# Altium PCB F_ROM.PcbDoc (part 2 of 3)
Units mil, origin at the board's own origin, x right, y up, seen from the top; angles counter-clockwise.
Board outline 10300 x 6600 mil, 2 copper layers (Top Layer, Bottom Layer); 788 components, 376 nets, 1392 pads, 0 vias.
Unrouted connection lines stored in the file: 465.
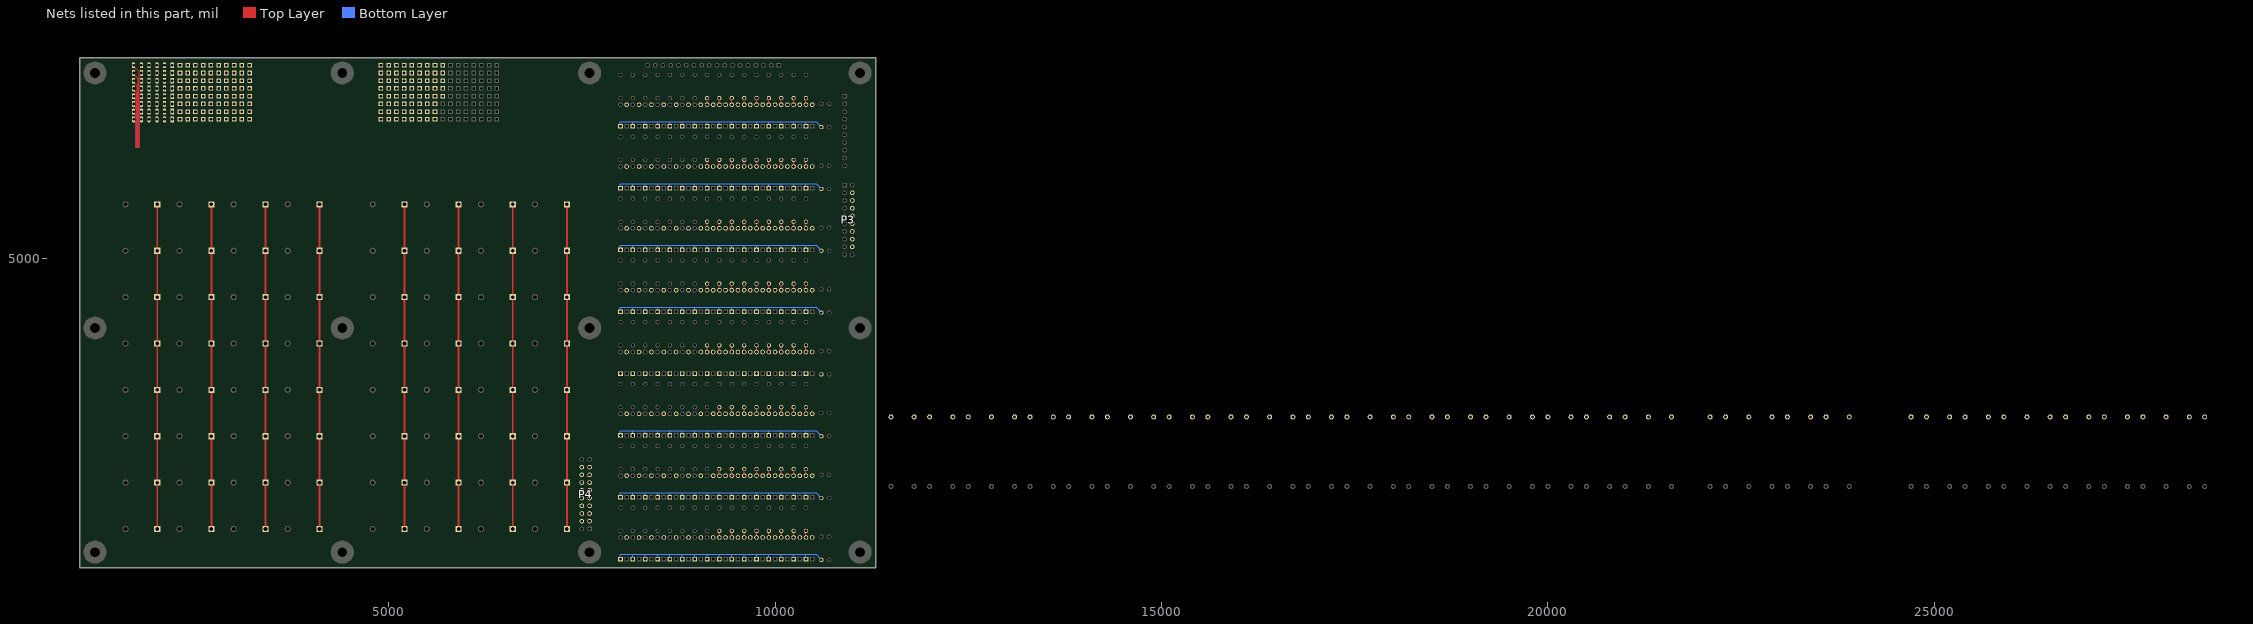
[diagram p2: the nets of this part, all layers, seen from the top]

## Components (designator, comment, footprint, x,y, rotation, side; value= is the part's Value field where it differs from the comment) (continued)
R1_S4 "" AXIAL-0.3 10400,4825 r90 top value=100k (schematic designator R1)
R1_S5 "" AXIAL-0.3 10400,4025 r90 top value=100k (schematic designator R1)
R1_S6 "" AXIAL-0.3 10400,3225 r90 top value=100k (schematic designator R1)
R1_S7 "" AXIAL-0.3 10400,2425 r90 top value=100k (schematic designator R1)
R1_S8 "" AXIAL-0.3 10400,1625 r90 top value=100k (schematic designator R1)
R2_S1 "" AXIAL-0.3 10240,7225 r90 top value=100k (schematic designator R2)
R2_S2 "" AXIAL-0.3 10240,6425 r90 top value=100k (schematic designator R2)
R2_S3 "" AXIAL-0.3 10240,5625 r90 top value=100k (schematic designator R2)
R2_S4 "" AXIAL-0.3 10240,4825 r90 top value=100k (schematic designator R2)
R2_S5 "" AXIAL-0.3 10240,4025 r90 top value=100k (schematic designator R2)
R2_S6 "" AXIAL-0.3 10240,3225 r90 top value=100k (schematic designator R2)
R2_S7 "" AXIAL-0.3 10240,2425 r90 top value=100k (schematic designator R2)
R2_S8 "" AXIAL-0.3 10240,1625 r90 top value=100k (schematic designator R2)
R3_S1 "" AXIAL-0.3 10080,7225 r90 top value=100k (schematic designator R3)
R3_S2 "" AXIAL-0.3 10080,6425 r90 top value=100k (schematic designator R3)
R3_S3 "" AXIAL-0.3 10080,5625 r90 top value=100k (schematic designator R3)
R3_S4 "" AXIAL-0.3 10080,4825 r90 top value=100k (schematic designator R3)
R3_S5 "" AXIAL-0.3 10080,4025 r90 top value=100k (schematic designator R3)
R3_S6 "" AXIAL-0.3 10080,3225 r90 top value=100k (schematic designator R3)
R3_S7 "" AXIAL-0.3 10080,2425 r90 top value=100k (schematic designator R3)
R3_S8 "" AXIAL-0.3 10080,1625 r90 top value=100k (schematic designator R3)
R4_S1 "" AXIAL-0.3 9920,7225 r90 top value=100k (schematic designator R4)
R4_S2 "" AXIAL-0.3 9920,6425 r90 top value=100k (schematic designator R4)
R4_S3 "" AXIAL-0.3 9920,5625 r90 top value=100k (schematic designator R4)
R4_S4 "" AXIAL-0.3 9920,4825 r90 top value=100k (schematic designator R4)
R4_S5 "" AXIAL-0.3 9920,4025 r90 top value=100k (schematic designator R4)
R4_S6 "" AXIAL-0.3 9920,3225 r90 top value=100k (schematic designator R4)
R4_S7 "" AXIAL-0.3 9920,2425 r90 top value=100k (schematic designator R4)
R4_S8 "" AXIAL-0.3 9920,1625 r90 top value=100k (schematic designator R4)
R5_S1 "" AXIAL-0.3 9760,7225 r90 top value=100k (schematic designator R5)
R5_S2 "" AXIAL-0.3 9760,6425 r90 top value=100k (schematic designator R5)
R5_S3 "" AXIAL-0.3 9760,5625 r90 top value=100k (schematic designator R5)
R5_S4 "" AXIAL-0.3 9760,4825 r90 top value=100k (schematic designator R5)
R5_S5 "" AXIAL-0.3 9760,4025 r90 top value=100k (schematic designator R5)
R5_S6 "" AXIAL-0.3 9760,3225 r90 top value=100k (schematic designator R5)
R5_S7 "" AXIAL-0.3 9760,2425 r90 top value=100k (schematic designator R5)
R5_S8 "" AXIAL-0.3 9760,1625 r90 top value=100k (schematic designator R5)
R6_S1 "" AXIAL-0.3 9600,7225 r90 top value=100k (schematic designator R6)
R6_S2 "" AXIAL-0.3 9600,6425 r90 top value=100k (schematic designator R6)
R6_S3 "" AXIAL-0.3 9600,5625 r90 top value=100k (schematic designator R6)
R6_S4 "" AXIAL-0.3 9600,4825 r90 top value=100k (schematic designator R6)
R6_S5 "" AXIAL-0.3 9600,4025 r90 top value=100k (schematic designator R6)
R6_S6 "" AXIAL-0.3 9600,3225 r90 top value=100k (schematic designator R6)
R6_S7 "" AXIAL-0.3 9600,2425 r90 top value=100k (schematic designator R6)
R6_S8 "" AXIAL-0.3 9600,1625 r90 top value=100k (schematic designator R6)
R7_S1 "" AXIAL-0.3 9440,7225 r90 top value=100k (schematic designator R7)
R7_S2 "" AXIAL-0.3 9440,6425 r90 top value=100k (schematic designator R7)
R7_S3 "" AXIAL-0.3 9440,5625 r90 top value=100k (schematic designator R7)
R7_S4 "" AXIAL-0.3 9440,4825 r90 top value=100k (schematic designator R7)
R7_S5 "" AXIAL-0.3 9440,4025 r90 top value=100k (schematic designator R7)
R7_S6 "" AXIAL-0.3 9440,3225 r90 top value=100k (schematic designator R7)
R7_S7 "" AXIAL-0.3 9440,2425 r90 top value=100k (schematic designator R7)
R7_S8 "" AXIAL-0.3 9440,1625 r90 top value=100k (schematic designator R7)
R8_S1 "" AXIAL-0.3 9280,7225 r90 top value=100k (schematic designator R8)
R8_S2 "" AXIAL-0.3 9280,6425 r90 top value=100k (schematic designator R8)
R8_S3 "" AXIAL-0.3 9280,5625 r90 top value=100k (schematic designator R8)
R8_S4 "" AXIAL-0.3 9280,4825 r90 top value=100k (schematic designator R8)
R8_S5 "" AXIAL-0.3 9280,4025 r90 top value=100k (schematic designator R8)
R8_S6 "" AXIAL-0.3 9280,3225 r90 top value=100k (schematic designator R8)
R8_S7 "" AXIAL-0.3 9280,2425 r90 top value=100k (schematic designator R8)
R8_S8 "" AXIAL-0.3 9280,1625 r90 top value=100k (schematic designator R8)
R9_S1 "" AXIAL-0.3 9120,7225 r90 top value=100k (schematic designator R9)
R9_S2 "" AXIAL-0.3 9120,6425 r90 top value=100k (schematic designator R9)
R9_S3 "" AXIAL-0.3 9120,5625 r90 top value=100k (schematic designator R9)
R9_S4 "" AXIAL-0.3 9120,4825 r90 top value=100k (schematic designator R9)
R9_S5 "" AXIAL-0.3 9120,4025 r90 top value=100k (schematic designator R9)
R9_S6 "" AXIAL-0.3 9120,3225 r90 top value=100k (schematic designator R9)
R9_S7 "" AXIAL-0.3 9120,2425 r90 top value=100k (schematic designator R9)
R9_S8 "" AXIAL-0.3 9120,1625 r90 top value=100k (schematic designator R9)
R10_S1 "" AXIAL-0.3 8960,7225 r90 top value=100k (schematic designator R10)
R10_S2 "" AXIAL-0.3 8960,6425 r90 top value=100k (schematic designator R10)
R10_S3 "" AXIAL-0.3 8960,5625 r90 top value=100k (schematic designator R10)
R10_S4 "" AXIAL-0.3 8960,4825 r90 top value=100k (schematic designator R10)
R10_S5 "" AXIAL-0.3 8960,4025 r90 top value=100k (schematic designator R10)
R10_S6 "" AXIAL-0.3 8960,3225 r90 top value=100k (schematic designator R10)
R10_S7 "" AXIAL-0.3 8960,2425 r90 top value=100k (schematic designator R10)
R10_S8 "" AXIAL-0.3 8960,1625 r90 top value=100k (schematic designator R10)
R11_S1 "" AXIAL-0.3 8800,7225 r90 top value=100k (schematic designator R11)
R11_S2 "" AXIAL-0.3 8800,6425 r90 top value=100k (schematic designator R11)
R11_S3 "" AXIAL-0.3 8800,5625 r90 top value=100k (schematic designator R11)
R11_S4 "" AXIAL-0.3 8800,4825 r90 top value=100k (schematic designator R11)
R11_S5 "" AXIAL-0.3 8800,4025 r90 top value=100k (schematic designator R11)
R11_S6 "" AXIAL-0.3 8800,3225 r90 top value=100k (schematic designator R11)
R11_S7 "" AXIAL-0.3 8800,2425 r90 top value=100k (schematic designator R11)
R11_S8 "" AXIAL-0.3 8800,1625 r90 top value=100k (schematic designator R11)
R12_S1 "" AXIAL-0.3 8640,7225 r90 top value=100k (schematic designator R12)
R12_S2 "" AXIAL-0.3 8640,6425 r90 top value=100k (schematic designator R12)
R12_S3 "" AXIAL-0.3 8640,5625 r90 top value=100k (schematic designator R12)
R12_S4 "" AXIAL-0.3 8640,4825 r90 top value=100k (schematic designator R12)
R12_S5 "" AXIAL-0.3 8640,4025 r90 top value=100k (schematic designator R12)
R12_S6 "" AXIAL-0.3 8640,3225 r90 top value=100k (schematic designator R12)
R12_S7 "" AXIAL-0.3 8640,2425 r90 top value=100k (schematic designator R12)
R12_S8 "" AXIAL-0.3 8640,1625 r90 top value=100k (schematic designator R12)
R13_S1 "" AXIAL-0.3 8480,7225 r90 top value=100k (schematic designator R13)
R13_S2 "" AXIAL-0.3 8480,6425 r90 top value=100k (schematic designator R13)
R13_S3 "" AXIAL-0.3 8480,5625 r90 top value=100k (schematic designator R13)
R13_S4 "" AXIAL-0.3 8480,4825 r90 top value=100k (schematic designator R13)
R13_S5 "" AXIAL-0.3 8480,4025 r90 top value=100k (schematic designator R13)
R13_S6 "" AXIAL-0.3 8480,3225 r90 top value=100k (schematic designator R13)
R13_S7 "" AXIAL-0.3 8480,2425 r90 top value=100k (schematic designator R13)
R13_S8 "" AXIAL-0.3 8480,1625 r90 top value=100k (schematic designator R13)
R14_S1 "" AXIAL-0.3 8320,7225 r90 top value=100k (schematic designator R14)
R14_S2 "" AXIAL-0.3 8320,6425 r90 top value=100k (schematic designator R14)
R14_S3 "" AXIAL-0.3 8320,5625 r90 top value=100k (schematic designator R14)
R14_S4 "" AXIAL-0.3 8320,4825 r90 top value=100k (schematic designator R14)
R14_S5 "" AXIAL-0.3 8320,4025 r90 top value=100k (schematic designator R14)
R14_S6 "" AXIAL-0.3 8320,3225 r90 top value=100k (schematic designator R14)
R14_S7 "" AXIAL-0.3 8320,2425 r90 top value=100k (schematic designator R14)
R14_S8 "" AXIAL-0.3 8320,1625 r90 top value=100k (schematic designator R14)
R15_S1 "" AXIAL-0.3 8160,7225 r90 top value=100k (schematic designator R15)
R15_S2 "" AXIAL-0.3 8160,6425 r90 top value=100k (schematic designator R15)
R15_S3 "" AXIAL-0.3 8160,5625 r90 top value=100k (schematic designator R15)
R15_S4 "" AXIAL-0.3 8160,4825 r90 top value=100k (schematic designator R15)
R15_S5 "" AXIAL-0.3 8160,4025 r90 top value=100k (schematic designator R15)
R15_S6 "" AXIAL-0.3 8160,3225 r90 top value=100k (schematic designator R15)
R15_S7 "" AXIAL-0.3 8160,2425 r90 top value=100k (schematic designator R15)
R15_S8 "" AXIAL-0.3 8160,1625 r90 top value=100k (schematic designator R15)
R16_S1 "" AXIAL-0.3 8000,7225 r90 top value=100k (schematic designator R16)
R16_S2 "" AXIAL-0.3 8000,6425 r90 top value=100k (schematic designator R16)
R16_S3 "" AXIAL-0.3 8000,5625 r90 top value=100k (schematic designator R16)
R16_S4 "" AXIAL-0.3 8000,4825 r90 top value=100k (schematic designator R16)
R16_S5 "" AXIAL-0.3 8000,4025 r90 top value=100k (schematic designator R16)
R16_S6 "" AXIAL-0.3 8000,3225 r90 top value=100k (schematic designator R16)
R16_S7 "" AXIAL-0.3 8000,2425 r90 top value=100k (schematic designator R16)
R16_S8 "" AXIAL-0.3 8000,1625 r90 top value=100k (schematic designator R16)
R17_S1 "" AXIAL-0.3 10700,6850 r90 top value=100k (schematic designator R17)
R17_S2 "" AXIAL-0.3 10700,6050 r90 top value=100k (schematic designator R17)
R17_S3 "" AXIAL-0.3 10700,5250 r90 top value=100k (schematic designator R17)
R17_S4 "" AXIAL-0.3 10700,4450 r90 top value=100k (schematic designator R17)
R17_S5 "" AXIAL-0.3 10700,3650 r90 top value=100k (schematic designator R17)
R17_S6 "" AXIAL-0.3 10700,2850 r90 top value=100k (schematic designator R17)
R17_S7 "" AXIAL-0.3 10700,2050 r90 top value=100k (schematic designator R17)
R17_S8 "" AXIAL-0.3 10700,1250 r90 top value=100k (schematic designator R17)
R18_S1 "" AXIAL-0.3 10600,6850 r270 top value=100k (schematic designator R18)
R18_S2 "" AXIAL-0.3 10600,6050 r270 top value=100k (schematic designator R18)
R18_S3 "" AXIAL-0.3 10600,5250 r270 top value=100k (schematic designator R18)
R18_S4 "" AXIAL-0.3 10600,4450 r270 top value=100k (schematic designator R18)
R18_S5 "" AXIAL-0.3 10600,3650 r270 top value=100k (schematic designator R18)
R18_S6 "" AXIAL-0.3 10600,2850 r270 top value=100k (schematic designator R18)
R18_S7 "" AXIAL-0.3 10600,2050 r270 top value=100k (schematic designator R18)
R18_S8 "" AXIAL-0.3 10600,1250 r270 top value=100k (schematic designator R18)

## Footprints (in the part's own frame and the unit in brackets; to place one, negate y for a bottom-side part, rotate by r counter-clockwise, add the part's x,y. Pads: shape width x height; smd on the part's side, far side on the other; paste and mask are expansions set on the pad)
AXIAL-0.3 [mm] "Axial Device, Thru-Hole; 2 Leads; 0.3 in Pin Spacing"
  round 1.4 hole 0.85: 1(-3.81,0) 2(3.81,0)
  silkscreen extent -2.77,-0.76 2.77,0.76
AXIAL-0.9 [mm] "Axial Device, Thru-Hole; 2 Leads; 0.9 in Pin Spacing"
  round 1.65 hole 1: 1(-11.43,0) 2(11.43,0)
  silkscreen extent -9.53,-2.54 9.53,2.54
DO-35 [mm] "Diode, Axial; Body 3.8 x 1.9 mm (LxDia. max), Lead Dia. 0.53 mm (max)"
  round 1.5 hole 0.9: 1(-3.55,0)
  rect 1.5x1.5 hole 0.9: 2(3.55,0)
  silkscreen extent -1.95,-0.95 2.05,0.95
DO-41 [mm] "Diode, Axial; Body 5.2 x 2.7 mm (LxDia. max), Lead Dia. 0.86 mm (max)"
  round 2 hole 1.2: 1(-5.23,0)
  rect 2x2 hole 1.2: 2(5.23,0)
  silkscreen extent -2.65,-1.4 2.75,1.4
HDR1X10 [mm] "Connector; Header; 10 Position"
  rect 1.5x1.5 hole 0.9: 1(0,0)
  round 1.5 hole 0.9: 2(2.54,0) 3(5.08,0) 4(7.62,0) 5(10.16,0) 6(12.7,0) 7(15.24,0) 8(17.78,0) 9(20.32,0) 10(22.86,0)
  silkscreen extent -1.27,-1.27 24.13,1.27
HDR1X18 [mm] "Connector; Header; 18 Position"
  rect 1.5x1.5 hole 0.9: 1(0,0)
  round 1.5 hole 0.9: 2(2.54,0) 3(5.08,0) 4(7.62,0) 5(10.16,0) 6(12.7,0) 7(15.24,0) 8(17.78,0) 9(20.32,0) 10(22.86,0) 11(25.4,0) 12(27.94,0) 13(30.48,0) 14(33.02,0) 15(35.56,0) 16(38.1,0) 17(40.64,0) 18(43.18,0)
  silkscreen extent -1.27,-1.27 44.45,1.27
HDR2X10 [mm] "Connector; Header; 10x2 Position"
  rect 1.5x1.5 hole 0.9: 1(0,0)
  round 1.5 hole 0.9: 2(0,2.54) 3(2.54,0) 4(2.54,2.54) 5(5.08,0) 6(5.08,2.54) 7(7.62,0) 8(7.62,2.54) 9(10.16,0) 10(10.16,2.54) 11(12.7,0) 12(12.7,2.54) 13(15.24,0) 14(15.24,2.54) 15(17.78,0) 16(17.78,2.54) 17(20.32,0) 18(20.32,2.54) 19(22.86,0) 20(22.86,2.54)
  silkscreen extent -1.27,-1.27 24.13,3.81
PIN1#1 [mil] "Connector; Plug"
  rrect50% 40.5x75 hole 35.43: 1(0,0)
  silkscreen extent -55,-55 55,86
PIN1#2 [mil] "Connector; Plug"
  rect 40.5x75 hole 35.43: 1(0,0)
  silkscreen extent -55,-55 55,86
PIN1#3 [mil] "Connector; Plug"
  rect 59.06x59.06 hole 35.43: 1(0,0)
  silkscreen extent -55,-55 55,86

## Part data
D1_S1 D1_S2 D1_S3 D1_S4 D1_S5 D1_S6 D1_S7 D1_S8 D2_S1 D2_S2 D2_S3 D2_S4 D2_S5 D2_S6 D2_S7 D2_S8 D3_S1 D3_S2 D3_S3 D3_S4 D3_S5 D3_S6 D3_S7 D3_S8 D4_S1 D4_S2 D4_S3 D4_S4 D4_S5 D4_S6 D4_S7 D4_S8 D5_S1 D5_S2 D5_S3 D5_S4 D5_S5 D5_S6 D5_S7 D5_S8 D6_S1 D6_S2 D6_S3 D6_S4 D6_S5 D6_S6 D6_S7 D6_S8 D7_S1 D7_S2 D7_S3 D7_S4 D7_S5 D7_S6 D7_S7 D7_S8 D8_S1 D8_S2 D8_S3 D8_S4 D8_S5 D8_S6 D8_S7 D8_S8 D9_S1 D9_S2 D9_S3 D9_S4 D9_S5 D9_S6 D9_S7 D9_S8 D10_S1 D10_S2 D10_S3 D10_S4 D10_S5 D10_S6 D10_S7 D10_S8 D11_S1 D11_S2 D11_S3 D11_S4 D11_S5 D11_S6 D11_S7 D11_S8 D12_S1 D12_S2 D12_S3 D12_S4 D12_S5 D12_S6 D12_S7 D12_S8 D13_S1 D13_S2 D13_S3 D13_S4 D13_S5 D13_S6 D13_S7 D13_S8 D14_S1 D14_S2 D14_S3 D14_S4 D14_S5 D14_S6 D14_S7 D14_S8 D15_S1 D15_S2 D15_S3 D15_S4 D15_S5 D15_S6 D15_S7 D15_S8 D16_S1 D16_S2 D16_S3 D16_S4 D16_S5 D16_S6 D16_S7 D16_S8 D17_S1 D17_S2 D17_S3 D17_S4 D17_S5 D17_S6 D17_S7 D17_S8 D18_S1 D18_S2 D18_S3 D18_S4 D18_S5 D18_S6 D18_S7 D18_S8 D19_S1 D19_S2 D19_S3 D19_S4 D19_S5 D19_S6 D19_S7 D19_S8 D20_S1 D20_S2 D20_S3 D20_S4 D20_S5 D20_S6 D20_S7 D20_S8 D21_S1 D21_S2 D21_S3 D21_S4 D21_S5 D21_S6 D21_S7 D21_S8 D22_S1 D22_S2 D22_S3 D22_S4 D22_S5 D22_S6 D22_S7 D22_S8 D23_S1 D23_S2 D23_S3 D23_S4 D23_S5 D23_S6 D23_S7 D23_S8 D24_S1 D24_S2 D24_S3 D24_S4 D24_S5 D24_S6 D24_S7 D24_S8 D25_S1 D25_S2 D25_S3 D25_S4 D25_S5 D25_S6 D25_S7 D25_S8 D26_S1 D26_S2 D26_S3 D26_S4 D26_S5 D26_S6 D26_S7 D26_S8 D27_S1 D27_S2 D27_S3 D27_S4 D27_S5 D27_S6 D27_S7 D27_S8 D28_S1 D28_S2 D28_S3 D28_S4 D28_S5 D28_S6 D28_S7 D28_S8 D29_S1 D29_S2 D29_S3 D29_S4 D29_S5 D29_S6 D29_S7 D29_S8 D30_S1 D30_S2 D30_S3 D30_S4 D30_S5 D30_S6 D30_S7 D30_S8 D31_S1 D31_S2 D31_S3 D31_S4 D31_S5 D31_S6 D31_S7 D31_S8 D32_S1 D32_S2 D32_S3 D32_S4 D32_S5 D32_S6 D32_S7 D32_S8: library part "Diode 1N4148", "High Conductance Fast Diode", Code_JEDEC=DO-204-AH, ComponentLink1Description="Manufacturer Link", ComponentLink1URL=http://www.fairchildsemi.com/, ComponentLink2Description=Datasheet, ComponentLink2URL=http://www.fairchildsemi.com/ds/1N%2F1N4148.pdf, DatasheetVersion=1997, LatestRevisionDate=17-Jul-2002, LatestRevisionNote="Re-released for DXP Platform.", PackageDescription="Diode, Axial; Body 3.8 x 1.9 mm (LxDia. max), Lead Dia. 0.53 mm (max)", PackageReference=DO-35, Published=8-Jun-2000, Publisher="Altium Limited"
D101 D102 D103 D104 D105 D106 D107 D108 D109 D110 D111 D112 D113 D114 D115 D116 D117 D118 D119 D120 D121 D122 D123 D124 D125 D126 D127 D128 D129 D130 D131 D132 D133 D134 D135 D136 D137 D138 D139 D140 D141 D142 D143 D144 D145 D146 D147 D148 D149 D150 D151 D152 D153 D154 D155 D156 D157 D158 D159 D160 D161 D162 D163 D164: library part "Diode 1N4007", "1 Amp General Purpose Rectifier", Code_JEDEC=DO-204-AL, ComponentLink1Description="Manufacturer Link", ComponentLink1URL=http://www.fairchildsemi.com/, ComponentLink2Description=Datasheet, ComponentLink2URL=http://www.fairchildsemi.com/ds/1N%2F1N4001.pdf, DatasheetVersion=1998, LatestRevisionDate=17-Jul-2002, LatestRevisionNote="Re-released for DXP Platform.", PackageDescription="Diode, Axial; Body 5.2 x 2.7 mm (LxDia. max), Lead Dia. 0.86 mm (max)", PackageReference=DO-41, PackageVersion=Aug-1999, Published=8-Jun-2000, Publisher="Altium Limited"
L1 L2 L3 L4 L5 L6 L7 L8 L9 L10 L11 L12 L13 L14 L15 L16 L17 L18 L19 L20 L21 L22 L23 L24 L25 L26 L27 L28 L29 L30 L31 L32 L33 L34 L35 L36 L37 L38 L39 L40 L41 L42 L43 L44 L45 L46 L47 L48 L49 L50 L51 L52 L53 L54 L55 L56 L57 L58 L59 L60 L61 L62 L63 L64: "Magnetic-Core Inductor", LatestRevisionDate=17-Jul-2002, LatestRevisionNote="Re-released for DXP Platform.", PackageDescription="Axial Device, Thru-Hole; 2 Leads; 0.9 in Pin Spacing", PackageReference=AXIAL-0.9, Published=24-Mar-1999, Publisher="Altium Limited"
P1: library part "Header 18", "Header, 18-Pin", LatestRevisionDate=17-Jul-2002, LatestRevisionNote="Re-released for DXP Platform.", Publisher="Altium Limited"
P2: library part "Header 10", "Header, 10-Pin", LatestRevisionDate=17-Jul-2002, LatestRevisionNote="Re-released for DXP Platform.", Publisher="Altium Limited"
P3 P4: library part "Header 10X2", "Header, 10-Pin, Dual row", LatestRevisionDate=17-Jul-2002, LatestRevisionNote="Re-released for DXP Platform.", Publisher="Altium Limited"
R1_S1 R1_S2 R1_S3 R1_S4 R1_S5 R1_S6 R1_S7 R1_S8 R2_S1 R2_S2 R2_S3 R2_S4 R2_S5 R2_S6 R2_S7 R2_S8 R3_S1 R3_S2 R3_S3 R3_S4 R3_S5 R3_S6 R3_S7 R3_S8 R4_S1 R4_S2 R4_S3 R4_S4 R4_S5 R4_S6 R4_S7 R4_S8 R5_S1 R5_S2 R5_S3 R5_S4 R5_S5 R5_S6 R5_S7 R5_S8 R6_S1 R6_S2 R6_S3 R6_S4 R6_S5 R6_S6 R6_S7 R6_S8 R7_S1 R7_S2 R7_S3 R7_S4 R7_S5 R7_S6 R7_S7 R7_S8 R8_S1 R8_S2 R8_S3 R8_S4 R8_S5 R8_S6 R8_S7 R8_S8 R9_S1 R9_S2 R9_S3 R9_S4 R9_S5 R9_S6 R9_S7 R9_S8 R10_S1 R10_S2 R10_S3 R10_S4 R10_S5 R10_S6 R10_S7 R10_S8 R11_S1 R11_S2 R11_S3 R11_S4 R11_S5 R11_S6 R11_S7 R11_S8 R12_S1 R12_S2 R12_S3 R12_S4 R12_S5 R12_S6 R12_S7 R12_S8 R13_S1 R13_S2 R13_S3 R13_S4 R13_S5 R13_S6 R13_S7 R13_S8 R14_S1 R14_S2 R14_S3 R14_S4 R14_S5 R14_S6 R14_S7 R14_S8 R15_S1 R15_S2 R15_S3 R15_S4 R15_S5 R15_S6 R15_S7 R15_S8 R16_S1 R16_S2 R16_S3 R16_S4 R16_S5 R16_S6 R16_S7 R16_S8 R17_S1 R17_S2 R17_S3 R17_S4 R17_S5 R17_S6 R17_S7 R17_S8 R18_S1 R18_S2 R18_S3 R18_S4 R18_S5 R18_S6 R18_S7 R18_S8: library part Res1, "Resistor", LatestRevisionDate=17-Jul-2002, LatestRevisionNote="Re-released for DXP Platform.", PackageDescription="Axial Device, Thru-Hole; 2 Leads; 0.3 in Pin Spacing", PackageReference=AXIAL-0.3, Published=8-Jun-2000, Publisher="Altium Limited"
A1_S1 A1_S2 A1_S3 A1_S4 A1_S5 A1_S6 A1_S7 A1_S8 A2_S1 A2_S2 A2_S3 A2_S4 A2_S5 A2_S6 A2_S7 A2_S8 A3_S1 A3_S2 A3_S3 A3_S4 A3_S5 A3_S6 A3_S7 A3_S8 A4_S1 A4_S2 A4_S3 A4_S4 A4_S5 A4_S6 A4_S7 A4_S8 A5_S1 A5_S2 A5_S3 A5_S4 A5_S5 A5_S6 A5_S7 A5_S8 A6_S1 A6_S2 A6_S3 A6_S4 A6_S5 A6_S6 A6_S7 A6_S8 A7_S1 A7_S2 A7_S3 A7_S4 A7_S5 A7_S6 A7_S7 A7_S8 A8_S1 A8_S2 A8_S3 A8_S4 A8_S5 A8_S6 A8_S7 A8_S8 A9_S1 A9_S2 A9_S3 A9_S4 A9_S5 A9_S6 A9_S7 A9_S8 A10_S1 A10_S2 A10_S3 A10_S4 A10_S5 A10_S6 A10_S7 A10_S8 A11_S1 A11_S2 A11_S3 A11_S4 A11_S5 A11_S6 A11_S7 A11_S8 A12_S1 A12_S2 A12_S3 A12_S4 A12_S5 A12_S6 A12_S7 A12_S8 A13_S1 A13_S2 A13_S3 A13_S4 A13_S5 A13_S6 A13_S7 A13_S8 A14_S1 A14_S2 A14_S3 A14_S4 A14_S5 A14_S6 A14_S7 A14_S8 A15_S1 A15_S2 A15_S3 A15_S4 A15_S5 A15_S6 A15_S7 A15_S8 A16_S1 A16_S2 A16_S3 A16_S4 A16_S5 A16_S6 A16_S7 A16_S8 B1_S1 B1_S2 B1_S3 B1_S4 B1_S5 B1_S6 B1_S7 B1_S8 B2_S1 B2_S2 B2_S3 B2_S4 B2_S5 B2_S6 B2_S7 B2_S8 B3_S1 B3_S2 B3_S3 B3_S4 B3_S5 B3_S6 B3_S7 B3_S8 B4_S1 B4_S2 B4_S3 B4_S4 B4_S5 B4_S6 B4_S7 B4_S8 B5_S1 B5_S2 B5_S3 B5_S4 B5_S5 B5_S6 B5_S7 B5_S8 B6_S1 B6_S2 B6_S3 B6_S4 B6_S5 B6_S6 B6_S7 B6_S8 B7_S1 B7_S2 B7_S3 B7_S4 B7_S5 B7_S6 B7_S7 B7_S8 B8_S1 B8_S2 B8_S3 B8_S4 B8_S5 B8_S6 B8_S7 B8_S8 B9_S1 B9_S2 B9_S3 B9_S4 B9_S5 B9_S6 B9_S7 B9_S8 B10_S1 B10_S2 B10_S3 B10_S4 B10_S5 B10_S6 B10_S7 B10_S8 B11_S1 B11_S2 B11_S3 B11_S4 B11_S5 B11_S6 B11_S7 B11_S8 B12_S1 B12_S2 B12_S3 B12_S4 B12_S5 B12_S6 B12_S7 B12_S8 B13_S1 B13_S2 B13_S3 B13_S4 B13_S5 B13_S6 B13_S7 B13_S8 B14_S1 B14_S2 B14_S3 B14_S4 B14_S5 B14_S6 B14_S7 B14_S8 B15_S1 B15_S2 B15_S3 B15_S4 B15_S5 B15_S6 B15_S7 B15_S8 B16_S1 B16_S2 B16_S3 B16_S4 B16_S5 B16_S6 B16_S7 B16_S8: LatestRevisionDate=17-Jul-2002, LatestRevisionNote="Re-released for DXP Platform.", Publisher="Altium Limited"

## Free pads (board coordinates)
  round 300 hole 126: 11(1200,1200) 11(1200,4100) 11(1200,7400) 11(4400,1200) 11(4400,4100) 11(4400,7400) 11(7600,1200) 11(7600,4100) 11(7600,7400) 11(11100,1200) 11(11100,4100) 11(11100,7400)

## Nets (pads, with @x,y where several pads share a name; then routed paths per layer and width w, separated by ;. In a path a pad name is that pad's centre, name@x,y a point inside that pad or via, vN(x,y) a via of type N, cw(c..) or ccw(c..) an arc to the next point about the centre after c; other vN are vias at no path point)
H1: L1.2 L2.2 L3.2 L4.2 L5.2 L6.2 L7.2 L8.2 P4.3
H2: L9.2 L10.2 L11.2 L12.2 L13.2 L14.2 L15.2 L16.2 P4.5
H3: L17.2 L18.2 L19.2 L20.2 L21.2 L22.2 L23.2 L24.2 P4.7
H4: L25.2 L26.2 L27.2 L28.2 L29.2 L30.2 L31.2 L32.2 P4.9
H5: L33.2 L34.2 L35.2 L36.2 L37.2 L38.2 L39.2 L40.2 P4.11
H6: L41.2 L42.2 L43.2 L44.2 L45.2 L46.2 L47.2 L48.2 P4.13
H7: L49.2 L50.2 L51.2 L52.2 L53.2 L54.2 L55.2 L56.2 P4.15
H8: L57.2 L58.2 L59.2 L60.2 L61.2 L62.2 L63.2 L64.2 P4.17
L1: D101.2 D109.2 D117.2 D125.2 D133.2 D141.2 D149.2 D157.2 P4.4 | length 4200
  Top Layer w25: D157.2@7305.91,1500 D149.2@7305.91,2100 D141.2@7305.91,2700 D133.2@7305.91,3300 D125.2@7305.91,3900 D117.2@7305.91,4500 D109.2@7305.91,5100 D101.2@7305.91,5700
L2: D102.2 D110.2 D118.2 D126.2 D134.2 D142.2 D150.2 D158.2 P4.6 | length 4200
  Top Layer w25: D158.2@6605.91,1500 D150.2@6605.91,2100 D142.2@6605.91,2700 D134.2@6605.91,3300 D126.2@6605.91,3900 D118.2@6605.91,4500 D110.2@6605.91,5100 D102.2@6605.91,5700
L3: D103.2 D111.2 D119.2 D127.2 D135.2 D143.2 D151.2 D159.2 P4.8 | length 4200
  Top Layer w25: D159.2@5905.91,1500 D151.2@5905.91,2100 D143.2@5905.91,2700 D135.2@5905.91,3300 D127.2@5905.91,3900 D119.2@5905.91,4500 D111.2@5905.91,5100 D103.2@5905.91,5700
L4: D104.2 D112.2 D120.2 D128.2 D136.2 D144.2 D152.2 D160.2 P4.10 | length 4200
  Top Layer w25: D160.2@5205.91,1500 D152.2@5205.91,2100 D144.2@5205.91,2700 D136.2@5205.91,3300 D128.2@5205.91,3900 D120.2@5205.91,4500 D112.2@5205.91,5100 D104.2@5205.91,5700
L5: D105.2 D113.2 D121.2 D129.2 D137.2 D145.2 D153.2 D161.2 P4.12 | length 4200
  Top Layer w25: D161.2@4105.91,1500 D153.2@4105.91,2100 D145.2@4105.91,2700 D137.2@4105.91,3300 D129.2@4105.91,3900 D121.2@4105.91,4500 D113.2@4105.91,5100 D105.2@4105.91,5700
L6: D106.2 D114.2 D122.2 D130.2 D138.2 D146.2 D154.2 D162.2 P4.14 | length 4200
  Top Layer w25: D162.2@3405.91,1500 D154.2@3405.91,2100 D146.2@3405.91,2700 D138.2@3405.91,3300 D130.2@3405.91,3900 D122.2@3405.91,4500 D114.2@3405.91,5100 D106.2@3405.91,5700
L7: D107.2 D115.2 D123.2 D131.2 D139.2 D147.2 D155.2 D163.2 P4.16 | length 4200
  Top Layer w25: D163.2@2705.91,1500 D155.2@2705.91,2100 D147.2@2705.91,2700 D139.2@2705.91,3300 D131.2@2705.91,3900 D123.2@2705.91,4500 D115.2@2705.91,5100 D107.2@2705.91,5700
L8: D108.2 D116.2 D124.2 D132.2 D140.2 D148.2 D156.2 D164.2 P4.18 | length 4200
  Top Layer w25: D164.2@2005.91,1500 D156.2@2005.91,2100 D148.2@2005.91,2700 D140.2@2005.91,3300 D132.2@2005.91,3900 D124.2@2005.91,4500 D116.2@2005.91,5100 D108.2@2005.91,5700
N1: D2_S1.2 D4_S1.2 D6_S1.2 D8_S1.2 D10_S1.2 D12_S1.2 D14_S1.2 D16_S1.2 D18_S1.2 D20_S1.2 D22_S1.2 D24_S1.2 D26_S1.2 D28_S1.2 D30_S1.2 D32_S1.2 P3.4 R18_S1.2 | length 3585.2
  Bottom Layer w6: D32_S1.2@8000,6710.24 8000,6770 8160,6770 ; D30_S1.2@8160,6710.24 8160,6770 ; D28_S1.2@8320,6710.24 8320,6770 ; D26_S1.2@8480,6710.24 8480,6770 8320,6770 ; 8480,6769.76 8640,6769.76 ; D24_S1.2@8640,6710 8640,6769.76 ; D22_S1.2@8800,6710 8800,6769.76 ; D20_S1.2@8960,6710 8960,6769.76 8800,6769.76 ; 8960,6770 9120,6770 ; D18_S1.2@9120,6710.24 9120,6770 ; D16_S1.2@9280,6710.24 9280,6770 ; D14_S1.2@9440,6710.24 9440,6770 ; D12_S1.2@9600,6710.24 9600,6770 ; D10_S1.2@9760,6710.24 9760,6770 ; D8_S1.2@9920,6710.24 9920,6770 ; D6_S1.2@10080,6710.24 10080,6770 ; D4_S1.2@10240,6710.24 10240,6770 ; D2_S1.2@10400,6710.24 10400,6770 ; R18_S1.2@10600,6700 10530,6770 10400,6770 ; 8160,6770 8320,6770 ; 8640,6769.76 8800,6769.76 ; 9120,6770 9280,6770 ; 9280,6770 9440,6770 ; 9440,6770 9600,6770 ; 9600,6770 9760,6770 ; 9760,6770 9920,6770 ; 9920,6770 10080,6770 ; 10080,6770 10240,6770 ; 10240,6770 10400,6770
N2: D2_S2.2 D4_S2.2 D6_S2.2 D8_S2.2 D10_S2.2 D12_S2.2 D14_S2.2 D16_S2.2 D18_S2.2 D20_S2.2 D22_S2.2 D24_S2.2 D26_S2.2 D28_S2.2 D30_S2.2 D32_S2.2 P3.6 R18_S2.2 | length 3585.2
  Bottom Layer w6: D32_S2.2@8000,5910.24 8000,5970 8160,5970 ; D30_S2.2@8160,5910.24 8160,5970 ; D28_S2.2@8320,5910.24 8320,5970 ; D26_S2.2@8480,5910.24 8480,5970 8320,5970 ; 8480,5969.76 8640,5969.76 ; D24_S2.2@8640,5910 8640,5969.76 ; D22_S2.2@8800,5910 8800,5969.76 ; D20_S2.2@8960,5910 8960,5969.76 8800,5969.76 ; 8960,5970 9120,5970 ; D18_S2.2@9120,5910.24 9120,5970 ; D16_S2.2@9280,5910.24 9280,5970 ; D14_S2.2@9440,5910.24 9440,5970 ; D12_S2.2@9600,5910.24 9600,5970 ; D10_S2.2@9760,5910.24 9760,5970 ; D8_S2.2@9920,5910.24 9920,5970 ; D6_S2.2@10080,5910.24 10080,5970 ; D4_S2.2@10240,5910.24 10240,5970 ; D2_S2.2@10400,5910.24 10400,5970 ; R18_S2.2@10600,5900 10530,5970 10400,5970 ; 8160,5970 8320,5970 ; 8640,5969.76 8800,5969.76 ; 9120,5970 9280,5970 ; 9280,5970 9440,5970 ; 9440,5970 9600,5970 ; 9600,5970 9760,5970 ; 9760,5970 9920,5970 ; 9920,5970 10080,5970 ; 10080,5970 10240,5970 ; 10240,5970 10400,5970
N3: D2_S3.2 D4_S3.2 D6_S3.2 D8_S3.2 D10_S3.2 D12_S3.2 D14_S3.2 D16_S3.2 D18_S3.2 D20_S3.2 D22_S3.2 D24_S3.2 D26_S3.2 D28_S3.2 D30_S3.2 D32_S3.2 P3.8 R18_S3.2 | length 3585.2
  Bottom Layer w6: D32_S3.2@8000,5110.24 8000,5170 8160,5170 ; D30_S3.2@8160,5110.24 8160,5170 ; D28_S3.2@8320,5110.24 8320,5170 ; D26_S3.2@8480,5110.24 8480,5170 8320,5170 ; 8480,5169.76 8640,5169.76 ; D24_S3.2@8640,5110 8640,5169.76 ; D22_S3.2@8800,5110 8800,5169.76 ; D20_S3.2@8960,5110 8960,5169.76 8800,5169.76 ; 8960,5170 9120,5170 ; D18_S3.2@9120,5110.24 9120,5170 ; D16_S3.2@9280,5110.24 9280,5170 ; D14_S3.2@9440,5110.24 9440,5170 ; D12_S3.2@9600,5110.24 9600,5170 ; D10_S3.2@9760,5110.24 9760,5170 ; D8_S3.2@9920,5110.24 9920,5170 ; D6_S3.2@10080,5110.24 10080,5170 ; D4_S3.2@10240,5110.24 10240,5170 ; D2_S3.2@10400,5110.24 10400,5170 ; R18_S3.2@10600,5100 10530,5170 10400,5170 ; 8160,5170 8320,5170 ; 8640,5169.76 8800,5169.76 ; 9120,5170 9280,5170 ; 9280,5170 9440,5170 ; 9440,5170 9600,5170 ; 9600,5170 9760,5170 ; 9760,5170 9920,5170 ; 9920,5170 10080,5170 ; 10080,5170 10240,5170 ; 10240,5170 10400,5170
N4: D2_S4.2 D4_S4.2 D6_S4.2 D8_S4.2 D10_S4.2 D12_S4.2 D14_S4.2 D16_S4.2 D18_S4.2 D20_S4.2 D22_S4.2 D24_S4.2 D26_S4.2 D28_S4.2 D30_S4.2 D32_S4.2 P3.10 R18_S4.2 | length 3585.2
  Bottom Layer w6: D32_S4.2@8000,4310.24 8000,4370 8160,4370 ; D30_S4.2@8160,4310.24 8160,4370 ; D28_S4.2@8320,4310.24 8320,4370 ; D26_S4.2@8480,4310.24 8480,4370 8320,4370 ; 8480,4369.76 8640,4369.76 ; D24_S4.2@8640,4310 8640,4369.76 ; D22_S4.2@8800,4310 8800,4369.76 ; D20_S4.2@8960,4310 8960,4369.76 8800,4369.76 ; 8960,4370 9120,4370 ; D18_S4.2@9120,4310.24 9120,4370 ; D16_S4.2@9280,4310.24 9280,4370 ; D14_S4.2@9440,4310.24 9440,4370 ; D12_S4.2@9600,4310.24 9600,4370 ; D10_S4.2@9760,4310.24 9760,4370 ; D8_S4.2@9920,4310.24 9920,4370 ; D6_S4.2@10080,4310.24 10080,4370 ; D4_S4.2@10240,4310.24 10240,4370 ; D2_S4.2@10400,4310.24 10400,4370 ; R18_S4.2@10600,4300 10530,4370 10400,4370 ; 8160,4370 8320,4370 ; 8640,4369.76 8800,4369.76 ; 9120,4370 9280,4370 ; 9280,4370 9440,4370 ; 9440,4370 9600,4370 ; 9600,4370 9760,4370 ; 9760,4370 9920,4370 ; 9920,4370 10080,4370 ; 10080,4370 10240,4370 ; 10240,4370 10400,4370
N5: D2_S5.2 D4_S5.2 D6_S5.2 D8_S5.2 D10_S5.2 D12_S5.2 D14_S5.2 D16_S5.2 D18_S5.2 D20_S5.2 D22_S5.2 D24_S5.2 D26_S5.2 D28_S5.2 D30_S5.2 D32_S5.2 P3.12 R18_S5.2
N6: D2_S6.2 D4_S6.2 D6_S6.2 D8_S6.2 D10_S6.2 D12_S6.2 D14_S6.2 D16_S6.2 D18_S6.2 D20_S6.2 D22_S6.2 D24_S6.2 D26_S6.2 D28_S6.2 D30_S6.2 D32_S6.2 P3.14 R18_S6.2 | length 3585.2
  Bottom Layer w6: D32_S6.2@8000,2710.24 8000,2770 8160,2770 ; D30_S6.2@8160,2710.24 8160,2770 ; D28_S6.2@8320,2710.24 8320,2770 ; D26_S6.2@8480,2710.24 8480,2770 8320,2770 ; 8480,2769.76 8640,2769.76 ; D24_S6.2@8640,2710 8640,2769.76 ; D22_S6.2@8800,2710 8800,2769.76 ; D20_S6.2@8960,2710 8960,2769.76 8800,2769.76 ; 8960,2770 9120,2770 ; D18_S6.2@9120,2710.24 9120,2770 ; D16_S6.2@9280,2710.24 9280,2770 ; D14_S6.2@9440,2710.24 9440,2770 ; D12_S6.2@9600,2710.24 9600,2770 ; D10_S6.2@9760,2710.24 9760,2770 ; D8_S6.2@9920,2710.24 9920,2770 ; D6_S6.2@10080,2710.24 10080,2770 ; D4_S6.2@10240,2710.24 10240,2770 ; D2_S6.2@10400,2710.24 10400,2770 ; R18_S6.2@10600,2700 10530,2770 10400,2770 ; 8160,2770 8320,2770 ; 8640,2769.76 8800,2769.76 ; 9120,2770 9280,2770 ; 9280,2770 9440,2770 ; 9440,2770 9600,2770 ; 9600,2770 9760,2770 ; 9760,2770 9920,2770 ; 9920,2770 10080,2770 ; 10080,2770 10240,2770 ; 10240,2770 10400,2770
N7: D2_S7.2 D4_S7.2 D6_S7.2 D8_S7.2 D10_S7.2 D12_S7.2 D14_S7.2 D16_S7.2 D18_S7.2 D20_S7.2 D22_S7.2 D24_S7.2 D26_S7.2 D28_S7.2 D30_S7.2 D32_S7.2 P3.16 R18_S7.2 | length 3585.2
  Bottom Layer w6: D32_S7.2@8000,1910.24 8000,1970 8160,1970 ; D30_S7.2@8160,1910.24 8160,1970 ; D28_S7.2@8320,1910.24 8320,1970 ; D26_S7.2@8480,1910.24 8480,1970 8320,1970 ; 8480,1969.76 8640,1969.76 ; D24_S7.2@8640,1910 8640,1969.76 ; D22_S7.2@8800,1910 8800,1969.76 ; D20_S7.2@8960,1910 8960,1969.76 8800,1969.76 ; 8960,1970 9120,1970 ; D18_S7.2@9120,1910.24 9120,1970 ; D16_S7.2@9280,1910.24 9280,1970 ; D14_S7.2@9440,1910.24 9440,1970 ; D12_S7.2@9600,1910.24 9600,1970 ; D10_S7.2@9760,1910.24 9760,1970 ; D8_S7.2@9920,1910.24 9920,1970 ; D6_S7.2@10080,1910.24 10080,1970 ; D4_S7.2@10240,1910.24 10240,1970 ; D2_S7.2@10400,1910.24 10400,1970 ; R18_S7.2@10600,1900 10530,1970 10400,1970 ; 8160,1970 8320,1970 ; 8640,1969.76 8800,1969.76 ; 9120,1970 9280,1970 ; 9280,1970 9440,1970 ; 9440,1970 9600,1970 ; 9600,1970 9760,1970 ; 9760,1970 9920,1970 ; 9920,1970 10080,1970 ; 10080,1970 10240,1970 ; 10240,1970 10400,1970
N8: D2_S8.2 D4_S8.2 D6_S8.2 D8_S8.2 D10_S8.2 D12_S8.2 D14_S8.2 D16_S8.2 D18_S8.2 D20_S8.2 D22_S8.2 D24_S8.2 D26_S8.2 D28_S8.2 D30_S8.2 D32_S8.2 P3.18 R18_S8.2 | length 3585.2
  Bottom Layer w6: D32_S8.2@8000,1110.24 8000,1170 8160,1170 ; D30_S8.2@8160,1110.24 8160,1170 ; D28_S8.2@8320,1110.24 8320,1170 ; D26_S8.2@8480,1110.24 8480,1170 8320,1170 ; 8480,1169.76 8640,1169.76 ; D24_S8.2@8640,1110 8640,1169.76 ; D22_S8.2@8800,1110 8800,1169.76 ; D20_S8.2@8960,1110 8960,1169.76 8800,1169.76 ; 8960,1170 9120,1170 ; D18_S8.2@9120,1110.24 9120,1170 ; D16_S8.2@9280,1110.24 9280,1170 ; D14_S8.2@9440,1110.24 9440,1170 ; D12_S8.2@9600,1110.24 9600,1170 ; D10_S8.2@9760,1110.24 9760,1170 ; D8_S8.2@9920,1110.24 9920,1170 ; D6_S8.2@10080,1110.24 10080,1170 ; D4_S8.2@10240,1110.24 10240,1170 ; D2_S8.2@10400,1110.24 10400,1170 ; R18_S8.2@10600,1100 10530,1170 10400,1170 ; 8160,1170 8320,1170 ; 8640,1169.76 8800,1169.76 ; 9120,1170 9280,1170 ; 9280,1170 9440,1170 ; 9440,1170 9600,1170 ; 9600,1170 9760,1170 ; 9760,1170 9920,1170 ; 9920,1170 10080,1170 ; 10080,1170 10240,1170 ; 10240,1170 10400,1170
NetA1_S1_1: A1_S1.1 D1_S1.1 | length 1098.9
  Top Layer w6: A1_S1.1@1700,7500 1700,7482.75 1769.75,7413 1769.75,6430
NetA1_S2_1: A1_S2.1 D1_S2.1 | length 993.5
  Top Layer w6: A1_S2.1@1700,7400 1700,7382.75 1756.75,7326 1756.75,6430
NetA1_S3_1: A1_S3.1 D1_S3.1 | length 888.1
  Top Layer w6: A1_S3.1@1700,7300 1700,7282.75 1743.75,7239 1743.75,6430
NetA1_S4_1: A1_S4.1 D1_S4.1 | length 782.7
  Top Layer w6: A1_S4.1@1700,7200 1700,7182.75 1730.75,7152 1730.75,6430
NetA1_S5_1: A1_S5.1 D1_S5.1 | length 698.9
  Bottom Layer w6: A1_S5.1@1700,7100 1700,7082.75 1769.75,7013 1769.75,6430
NetA1_S6_1: A1_S6.1 D1_S6.1 | length 593.5
  Bottom Layer w6: A1_S6.1@1700,7000 1700,6982.75 1756.75,6926 1756.75,6430
NetA1_S7_1: A1_S7.1 D1_S7.1 | length 488.1
  Bottom Layer w6: A1_S7.1@1700,6900 1700,6882.75 1743.75,6839 1743.75,6430
NetA1_S8_1: A1_S8.1 D1_S8.1 | length 382.7
  Bottom Layer w6: A1_S8.1@1700,6800 1700,6782.75 1730.75,6752 1730.75,6430
NetA2_S1_1: A2_S1.1 D3_S1.1
NetA2_S2_1: A2_S2.1 D3_S2.1
NetA2_S3_1: A2_S3.1 D3_S3.1
NetA2_S4_1: A2_S4.1 D3_S4.1
NetA2_S5_1: A2_S5.1 D3_S5.1
NetA2_S6_1: A2_S6.1 D3_S6.1
NetA2_S7_1: A2_S7.1 D3_S7.1
NetA2_S8_1: A2_S8.1 D3_S8.1
NetA3_S1_1: A3_S1.1 D5_S1.1
NetA3_S2_1: A3_S2.1 D5_S2.1
NetA3_S3_1: A3_S3.1 D5_S3.1
NetA3_S4_1: A3_S4.1 D5_S4.1
NetA3_S5_1: A3_S5.1 D5_S5.1
NetA3_S6_1: A3_S6.1 D5_S6.1
NetA3_S7_1: A3_S7.1 D5_S7.1
NetA3_S8_1: A3_S8.1 D5_S8.1
NetA4_S1_1: A4_S1.1 D7_S1.1
NetA4_S2_1: A4_S2.1 D7_S2.1
NetA4_S3_1: A4_S3.1 D7_S3.1
NetA4_S4_1: A4_S4.1 D7_S4.1
NetA4_S5_1: A4_S5.1 D7_S5.1
NetA4_S6_1: A4_S6.1 D7_S6.1
NetA4_S7_1: A4_S7.1 D7_S7.1
NetA4_S8_1: A4_S8.1 D7_S8.1
NetA5_S1_1: A5_S1.1 D9_S1.1
NetA5_S2_1: A5_S2.1 D9_S2.1
NetA5_S3_1: A5_S3.1 D9_S3.1
NetA5_S4_1: A5_S4.1 D9_S4.1
NetA5_S5_1: A5_S5.1 D9_S5.1
NetA5_S6_1: A5_S6.1 D9_S6.1
NetA5_S7_1: A5_S7.1 D9_S7.1
NetA5_S8_1: A5_S8.1 D9_S8.1
NetA6_S1_1: A6_S1.1 D11_S1.1
NetA6_S2_1: A6_S2.1 D11_S2.1
NetA6_S3_1: A6_S3.1 D11_S3.1
NetA6_S4_1: A6_S4.1 D11_S4.1
NetA6_S5_1: A6_S5.1 D11_S5.1
NetA6_S6_1: A6_S6.1 D11_S6.1
NetA6_S7_1: A6_S7.1 D11_S7.1
NetA6_S8_1: A6_S8.1 D11_S8.1
NetA7_S1_1: A7_S1.1 D13_S1.1
NetA7_S2_1: A7_S2.1 D13_S2.1
NetA7_S3_1: A7_S3.1 D13_S3.1
NetA7_S4_1: A7_S4.1 D13_S4.1
NetA7_S5_1: A7_S5.1 D13_S5.1
NetA7_S6_1: A7_S6.1 D13_S6.1
NetA7_S7_1: A7_S7.1 D13_S7.1
NetA7_S8_1: A7_S8.1 D13_S8.1
NetA8_S1_1: A8_S1.1 D15_S1.1
NetA8_S2_1: A8_S2.1 D15_S2.1
NetA8_S3_1: A8_S3.1 D15_S3.1
NetA8_S4_1: A8_S4.1 D15_S4.1
NetA8_S5_1: A8_S5.1 D15_S5.1
NetA8_S6_1: A8_S6.1 D15_S6.1
NetA8_S7_1: A8_S7.1 D15_S7.1
NetA8_S8_1: A8_S8.1 D15_S8.1
NetA9_S1_1: A9_S1.1 D17_S1.1
NetA9_S2_1: A9_S2.1 D17_S2.1
NetA9_S3_1: A9_S3.1 D17_S3.1
NetA9_S4_1: A9_S4.1 D17_S4.1
NetA9_S5_1: A9_S5.1 D17_S5.1
NetA9_S6_1: A9_S6.1 D17_S6.1
NetA9_S7_1: A9_S7.1 D17_S7.1
NetA9_S8_1: A9_S8.1 D17_S8.1
NetA10_S1_1: A10_S1.1 D19_S1.1
NetA10_S2_1: A10_S2.1 D19_S2.1
NetA10_S3_1: A10_S3.1 D19_S3.1
NetA10_S4_1: A10_S4.1 D19_S4.1
NetA10_S5_1: A10_S5.1 D19_S5.1
NetA10_S6_1: A10_S6.1 D19_S6.1
NetA10_S7_1: A10_S7.1 D19_S7.1
NetA10_S8_1: A10_S8.1 D19_S8.1
NetA11_S1_1: A11_S1.1 D21_S1.1
NetA11_S2_1: A11_S2.1 D21_S2.1
NetA11_S3_1: A11_S3.1 D21_S3.1
NetA11_S4_1: A11_S4.1 D21_S4.1
NetA11_S5_1: A11_S5.1 D21_S5.1
NetA11_S6_1: A11_S6.1 D21_S6.1
NetA11_S7_1: A11_S7.1 D21_S7.1
NetA11_S8_1: A11_S8.1 D21_S8.1
NetA12_S1_1: A12_S1.1 D23_S1.1
NetA12_S2_1: A12_S2.1 D23_S2.1
NetA12_S3_1: A12_S3.1 D23_S3.1
NetA12_S4_1: A12_S4.1 D23_S4.1
NetA12_S5_1: A12_S5.1 D23_S5.1
NetA12_S6_1: A12_S6.1 D23_S6.1
NetA12_S7_1: A12_S7.1 D23_S7.1
NetA12_S8_1: A12_S8.1 D23_S8.1
NetA13_S1_1: A13_S1.1 D25_S1.1
NetA13_S2_1: A13_S2.1 D25_S2.1
NetA13_S3_1: A13_S3.1 D25_S3.1
NetA13_S4_1: A13_S4.1 D25_S4.1
NetA13_S5_1: A13_S5.1 D25_S5.1
NetA13_S6_1: A13_S6.1 D25_S6.1
NetA13_S7_1: A13_S7.1 D25_S7.1
NetA13_S8_1: A13_S8.1 D25_S8.1
NetA14_S1_1: A14_S1.1 D27_S1.1
NetA14_S2_1: A14_S2.1 D27_S2.1
NetA14_S3_1: A14_S3.1 D27_S3.1
NetA14_S4_1: A14_S4.1 D27_S4.1
NetA14_S5_1: A14_S5.1 D27_S5.1
NetA14_S6_1: A14_S6.1 D27_S6.1
NetA14_S7_1: A14_S7.1 D27_S7.1
NetA14_S8_1: A14_S8.1 D27_S8.1
NetA15_S1_1: A15_S1.1 D29_S1.1
NetA15_S2_1: A15_S2.1 D29_S2.1
NetA15_S3_1: A15_S3.1 D29_S3.1
NetA15_S4_1: A15_S4.1 D29_S4.1
NetA15_S5_1: A15_S5.1 D29_S5.1
NetA15_S6_1: A15_S6.1 D29_S6.1
NetA15_S7_1: A15_S7.1 D29_S7.1
NetA15_S8_1: A15_S8.1 D29_S8.1
NetA16_S1_1: A16_S1.1 D31_S1.1
NetA16_S2_1: A16_S2.1 D31_S2.1
NetA16_S3_1: A16_S3.1 D31_S3.1
NetA16_S4_1: A16_S4.1 D31_S4.1
NetA16_S5_1: A16_S5.1 D31_S5.1
NetA16_S6_1: A16_S6.1 D31_S6.1
NetA16_S7_1: A16_S7.1 D31_S7.1
NetA16_S8_1: A16_S8.1 D31_S8.1
NetB1_S1_1: B1_S1.1 D2_S1.1 R1_S1.1 | length 85.2
  Top Layer w6: D2_S1.1@10400,6989.76 R1_S1.1@10400,7075
NetB1_S2_1: B1_S2.1 D2_S2.1 R1_S2.1 | length 85.2
  Top Layer w6: D2_S2.1@10400,6189.76 R1_S2.1@10400,6275
NetB1_S3_1: B1_S3.1 D2_S3.1 R1_S3.1 | length 85.2
  Top Layer w6: D2_S3.1@10400,5389.76 R1_S3.1@10400,5475
NetB1_S4_1: B1_S4.1 D2_S4.1 R1_S4.1 | length 85.2
  Top Layer w6: D2_S4.1@10400,4589.76 R1_S4.1@10400,4675
NetB1_S5_1: B1_S5.1 D2_S5.1 R1_S5.1 | length 85.2
  Top Layer w6: D2_S5.1@10400,3789.76 R1_S5.1@10400,3875
NetB1_S6_1: B1_S6.1 D2_S6.1 R1_S6.1 | length 85.2
  Top Layer w6: D2_S6.1@10400,2989.76 R1_S6.1@10400,3075
NetB1_S7_1: B1_S7.1 D2_S7.1 R1_S7.1 | length 85.2
  Top Layer w6: D2_S7.1@10400,2189.76 R1_S7.1@10400,2275
NetB1_S8_1: B1_S8.1 D2_S8.1 R1_S8.1 | length 85.2
  Top Layer w6: D2_S8.1@10400,1389.76 R1_S8.1@10400,1475
NetB2_S1_1: B2_S1.1 D4_S1.1 R2_S1.1 | length 85.2
  Top Layer w6: D4_S1.1@10240,6989.76 R2_S1.1@10240,7075
NetB2_S2_1: B2_S2.1 D4_S2.1 R2_S2.1 | length 85.2
  Top Layer w6: D4_S2.1@10240,6189.76 R2_S2.1@10240,6275
NetB2_S3_1: B2_S3.1 D4_S3.1 R2_S3.1 | length 85.2
  Top Layer w6: D4_S3.1@10240,5389.76 R2_S3.1@10240,5475
NetB2_S4_1: B2_S4.1 D4_S4.1 R2_S4.1 | length 85.2
  Top Layer w6: D4_S4.1@10240,4589.76 R2_S4.1@10240,4675
NetB2_S5_1: B2_S5.1 D4_S5.1 R2_S5.1 | length 85.2
  Top Layer w6: D4_S5.1@10240,3789.76 R2_S5.1@10240,3875
NetB2_S6_1: B2_S6.1 D4_S6.1 R2_S6.1 | length 85.2
  Top Layer w6: D4_S6.1@10240,2989.76 R2_S6.1@10240,3075
NetB2_S7_1: B2_S7.1 D4_S7.1 R2_S7.1 | length 85.2
  Top Layer w6: D4_S7.1@10240,2189.76 R2_S7.1@10240,2275
NetB2_S8_1: B2_S8.1 D4_S8.1 R2_S8.1 | length 85.2
  Top Layer w6: D4_S8.1@10240,1389.76 R2_S8.1@10240,1475
NetB3_S1_1: B3_S1.1 D6_S1.1 R3_S1.1 | length 85.2
  Top Layer w6: D6_S1.1@10080,6989.76 R3_S1.1@10080,7075
NetB3_S2_1: B3_S2.1 D6_S2.1 R3_S2.1 | length 85.2
  Top Layer w6: D6_S2.1@10080,6189.76 R3_S2.1@10080,6275
NetB3_S3_1: B3_S3.1 D6_S3.1 R3_S3.1 | length 85.2
  Top Layer w6: D6_S3.1@10080,5389.76 R3_S3.1@10080,5475
NetB3_S4_1: B3_S4.1 D6_S4.1 R3_S4.1 | length 85.2
  Top Layer w6: D6_S4.1@10080,4589.76 R3_S4.1@10080,4675
NetB3_S5_1: B3_S5.1 D6_S5.1 R3_S5.1 | length 85.2
  Top Layer w6: D6_S5.1@10080,3789.76 R3_S5.1@10080,3875
NetB3_S6_1: B3_S6.1 D6_S6.1 R3_S6.1 | length 85.2
  Top Layer w6: D6_S6.1@10080,2989.76 R3_S6.1@10080,3075
NetB3_S7_1: B3_S7.1 D6_S7.1 R3_S7.1 | length 85.2
  Top Layer w6: D6_S7.1@10080,2189.76 R3_S7.1@10080,2275
NetB3_S8_1: B3_S8.1 D6_S8.1 R3_S8.1 | length 85.2
  Top Layer w6: D6_S8.1@10080,1389.76 R3_S8.1@10080,1475
NetB4_S1_1: B4_S1.1 D8_S1.1 R4_S1.1 | length 85.2
  Top Layer w6: D8_S1.1@9920,6989.76 R4_S1.1@9920,7075
NetB4_S2_1: B4_S2.1 D8_S2.1 R4_S2.1 | length 85.2
  Top Layer w6: D8_S2.1@9920,6189.76 R4_S2.1@9920,6275
NetB4_S3_1: B4_S3.1 D8_S3.1 R4_S3.1 | length 85.2
  Top Layer w6: D8_S3.1@9920,5389.76 R4_S3.1@9920,5475
NetB4_S4_1: B4_S4.1 D8_S4.1 R4_S4.1 | length 85.2
  Top Layer w6: D8_S4.1@9920,4589.76 R4_S4.1@9920,4675
NetB4_S5_1: B4_S5.1 D8_S5.1 R4_S5.1 | length 85.2
  Top Layer w6: D8_S5.1@9920,3789.76 R4_S5.1@9920,3875
NetB4_S6_1: B4_S6.1 D8_S6.1 R4_S6.1 | length 85.2
  Top Layer w6: D8_S6.1@9920,2989.76 R4_S6.1@9920,3075
NetB4_S7_1: B4_S7.1 D8_S7.1 R4_S7.1 | length 85.2
  Top Layer w6: D8_S7.1@9920,2189.76 R4_S7.1@9920,2275
NetB4_S8_1: B4_S8.1 D8_S8.1 R4_S8.1 | length 85.2
  Top Layer w6: D8_S8.1@9920,1389.76 R4_S8.1@9920,1475
NetB5_S1_1: B5_S1.1 D10_S1.1 R5_S1.1 | length 85.2
  Top Layer w6: D10_S1.1@9760,6989.53 R5_S1.1@9760,7074.76
NetB5_S2_1: B5_S2.1 D10_S2.1 R5_S2.1 | length 85.2
  Top Layer w6: D10_S2.1@9760,6189.53 R5_S2.1@9760,6274.76
NetB5_S3_1: B5_S3.1 D10_S3.1 R5_S3.1 | length 85.2
  Top Layer w6: D10_S3.1@9760,5389.53 R5_S3.1@9760,5474.76
NetB5_S4_1: B5_S4.1 D10_S4.1 R5_S4.1 | length 85.2
  Top Layer w6: D10_S4.1@9760,4589.53 R5_S4.1@9760,4674.76
NetB5_S5_1: B5_S5.1 D10_S5.1 R5_S5.1 | length 85.2
  Top Layer w6: D10_S5.1@9760,3789.53 R5_S5.1@9760,3874.76
NetB5_S6_1: B5_S6.1 D10_S6.1 R5_S6.1 | length 85.2
  Top Layer w6: D10_S6.1@9760,2989.53 R5_S6.1@9760,3074.76
NetB5_S7_1: B5_S7.1 D10_S7.1 R5_S7.1 | length 85.2
  Top Layer w6: D10_S7.1@9760,2189.53 R5_S7.1@9760,2274.76
NetB5_S8_1: B5_S8.1 D10_S8.1 R5_S8.1 | length 85.2
  Top Layer w6: D10_S8.1@9760,1389.53 R5_S8.1@9760,1474.76
NetB6_S1_1: B6_S1.1 D12_S1.1 R6_S1.1 | length 85.2
  Top Layer w6: D12_S1.1@9600,6989.53 R6_S1.1@9600,7074.76
NetB6_S2_1: B6_S2.1 D12_S2.1 R6_S2.1 | length 85.2
  Top Layer w6: D12_S2.1@9600,6189.53 R6_S2.1@9600,6274.76
NetB6_S3_1: B6_S3.1 D12_S3.1 R6_S3.1 | length 85.2
  Top Layer w6: D12_S3.1@9600,5389.53 R6_S3.1@9600,5474.76
NetB6_S4_1: B6_S4.1 D12_S4.1 R6_S4.1 | length 85.2
  Top Layer w6: D12_S4.1@9600,4589.53 R6_S4.1@9600,4674.76
NetB6_S5_1: B6_S5.1 D12_S5.1 R6_S5.1 | length 85.2
  Top Layer w6: D12_S5.1@9600,3789.53 R6_S5.1@9600,3874.76
NetB6_S6_1: B6_S6.1 D12_S6.1 R6_S6.1 | length 85.2
  Top Layer w6: D12_S6.1@9600,2989.53 R6_S6.1@9600,3074.76
NetB6_S7_1: B6_S7.1 D12_S7.1 R6_S7.1 | length 85.2
  Top Layer w6: D12_S7.1@9600,2189.53 R6_S7.1@9600,2274.76
NetB6_S8_1: B6_S8.1 D12_S8.1 R6_S8.1 | length 85.2
  Top Layer w6: D12_S8.1@9600,1389.53 R6_S8.1@9600,1474.76
NetB7_S1_1: B7_S1.1 D14_S1.1 R7_S1.1 | length 85.2
  Top Layer w6: D14_S1.1@9440,6989.53 R7_S1.1@9440,7074.76
NetB7_S2_1: B7_S2.1 D14_S2.1 R7_S2.1 | length 85.2
  Top Layer w6: D14_S2.1@9440,6189.53 R7_S2.1@9440,6274.76
NetB7_S3_1: B7_S3.1 D14_S3.1 R7_S3.1 | length 85.2
  Top Layer w6: D14_S3.1@9440,5389.53 R7_S3.1@9440,5474.76
NetB7_S4_1: B7_S4.1 D14_S4.1 R7_S4.1 | length 85.2
  Top Layer w6: D14_S4.1@9440,4589.53 R7_S4.1@9440,4674.76
NetB7_S5_1: B7_S5.1 D14_S5.1 R7_S5.1 | length 85.2
  Top Layer w6: D14_S5.1@9440,3789.53 R7_S5.1@9440,3874.76
NetB7_S6_1: B7_S6.1 D14_S6.1 R7_S6.1 | length 85.2
  Top Layer w6: D14_S6.1@9440,2989.53 R7_S6.1@9440,3074.76
NetB7_S7_1: B7_S7.1 D14_S7.1 R7_S7.1 | length 85.2
  Top Layer w6: D14_S7.1@9440,2189.53 R7_S7.1@9440,2274.76
NetB7_S8_1: B7_S8.1 D14_S8.1 R7_S8.1 | length 85.2
  Top Layer w6: D14_S8.1@9440,1389.53 R7_S8.1@9440,1474.76
NetB8_S1_1: B8_S1.1 D16_S1.1 R8_S1.1 | length 85.2
  Top Layer w6: D16_S1.1@9280,6989.53 R8_S1.1@9280,7074.76
NetB8_S2_1: B8_S2.1 D16_S2.1 R8_S2.1 | length 85.2
  Top Layer w6: D16_S2.1@9280,6189.53 R8_S2.1@9280,6274.76
NetB8_S3_1: B8_S3.1 D16_S3.1 R8_S3.1 | length 85.2
  Top Layer w6: D16_S3.1@9280,5389.53 R8_S3.1@9280,5474.76
NetB8_S4_1: B8_S4.1 D16_S4.1 R8_S4.1 | length 85.2
  Top Layer w6: D16_S4.1@9280,4589.53 R8_S4.1@9280,4674.76
NetB8_S5_1: B8_S5.1 D16_S5.1 R8_S5.1 | length 85.2
  Top Layer w6: D16_S5.1@9280,3789.53 R8_S5.1@9280,3874.76
NetB8_S6_1: B8_S6.1 D16_S6.1 R8_S6.1 | length 85.2
  Top Layer w6: D16_S6.1@9280,2989.53 R8_S6.1@9280,3074.76
NetB8_S7_1: B8_S7.1 D16_S7.1 R8_S7.1 | length 85.2
  Top Layer w6: D16_S7.1@9280,2189.53 R8_S7.1@9280,2274.76
NetB8_S8_1: B8_S8.1 D16_S8.1 R8_S8.1 | length 85.2
  Top Layer w6: D16_S8.1@9280,1389.53 R8_S8.1@9280,1474.76
NetB9_S1_1: B9_S1.1 D18_S1.1 R9_S1.1 | length 85.2
  Top Layer w6: D18_S1.1@9120,6989.76 R9_S1.1@9120,7075
NetB9_S2_1: B9_S2.1 D18_S2.1 R9_S2.1 | length 85.2
  Top Layer w6: D18_S2.1@9120,6189.76 R9_S2.1@9120,6275
NetB9_S3_1: B9_S3.1 D18_S3.1 R9_S3.1 | length 85.2
  Top Layer w6: D18_S3.1@9120,5389.76 R9_S3.1@9120,5475
NetB9_S4_1: B9_S4.1 D18_S4.1 R9_S4.1 | length 85.2
  Top Layer w6: D18_S4.1@9120,4589.76 R9_S4.1@9120,4675
NetB9_S5_1: B9_S5.1 D18_S5.1 R9_S5.1 | length 85.2
  Top Layer w6: D18_S5.1@9120,3789.76 R9_S5.1@9120,3875